# Altium PCB cs301_group7--4 holes.PcbDoc
Units mil, origin at the board's own origin, x right, y up, seen from the top; angles counter-clockwise.
Board outline 10825 x 6635 mil, 2 copper layers (Top Layer, Bottom Layer); 51 components, 21 nets, 162 pads, 0 vias.
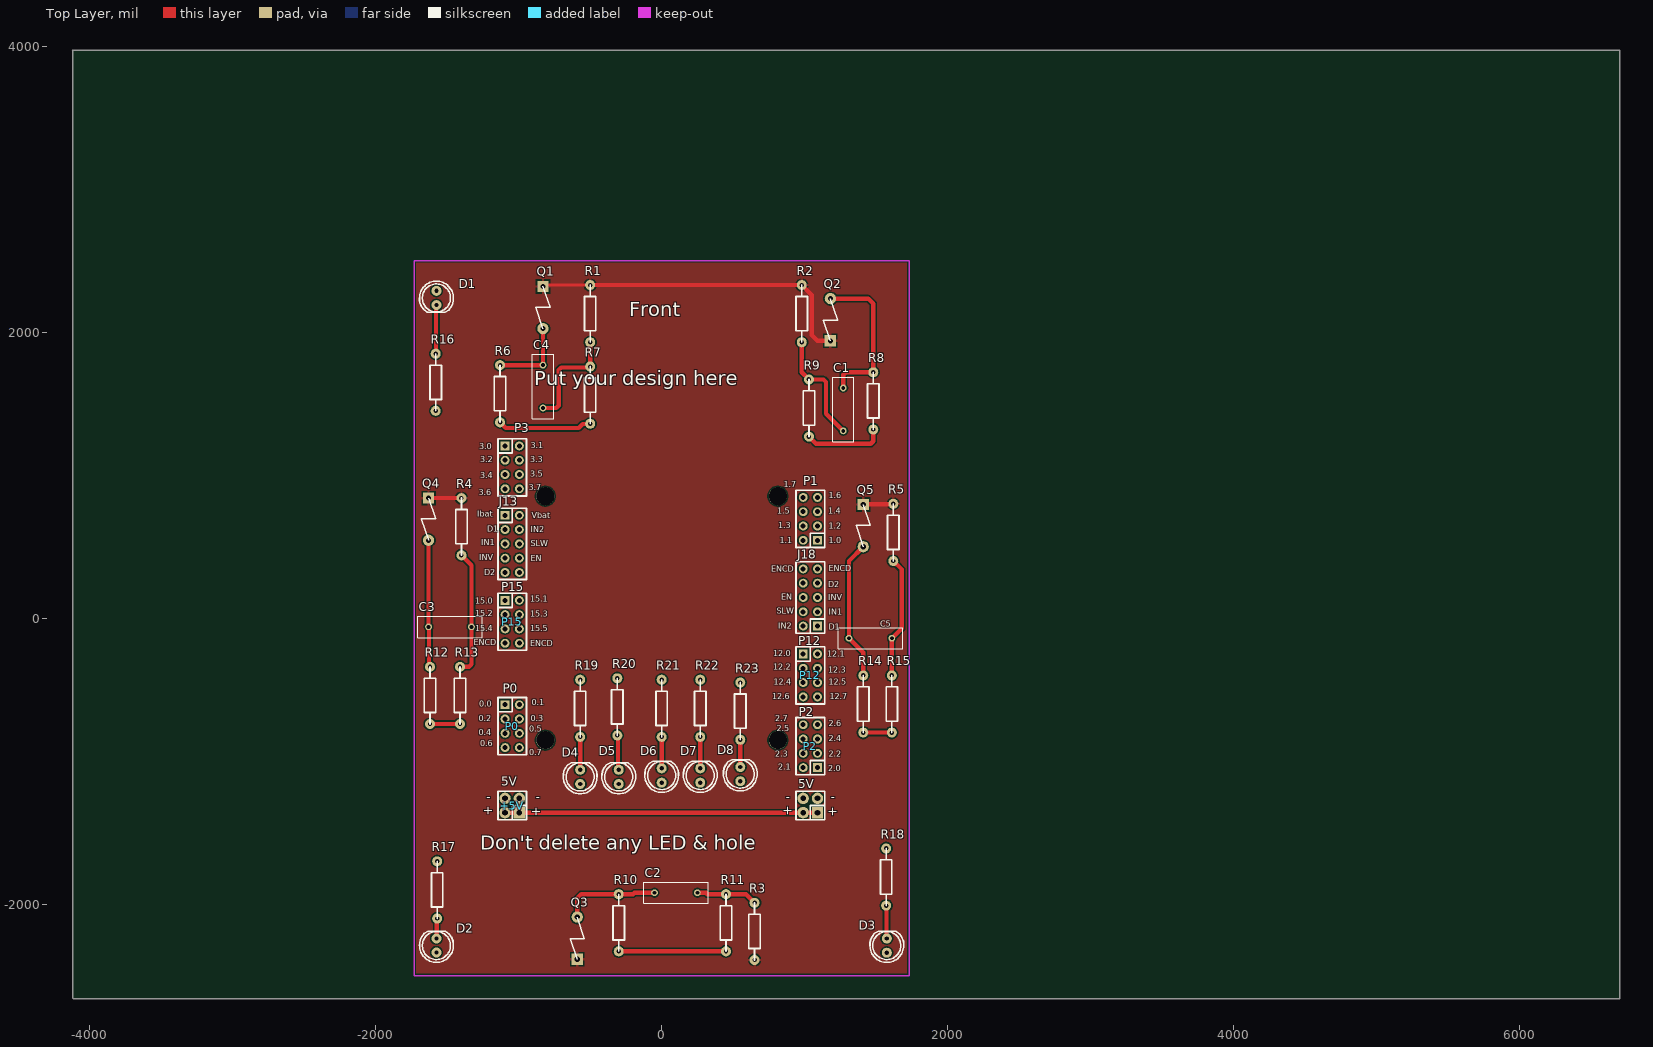
[diagram p0: Top Layer view]
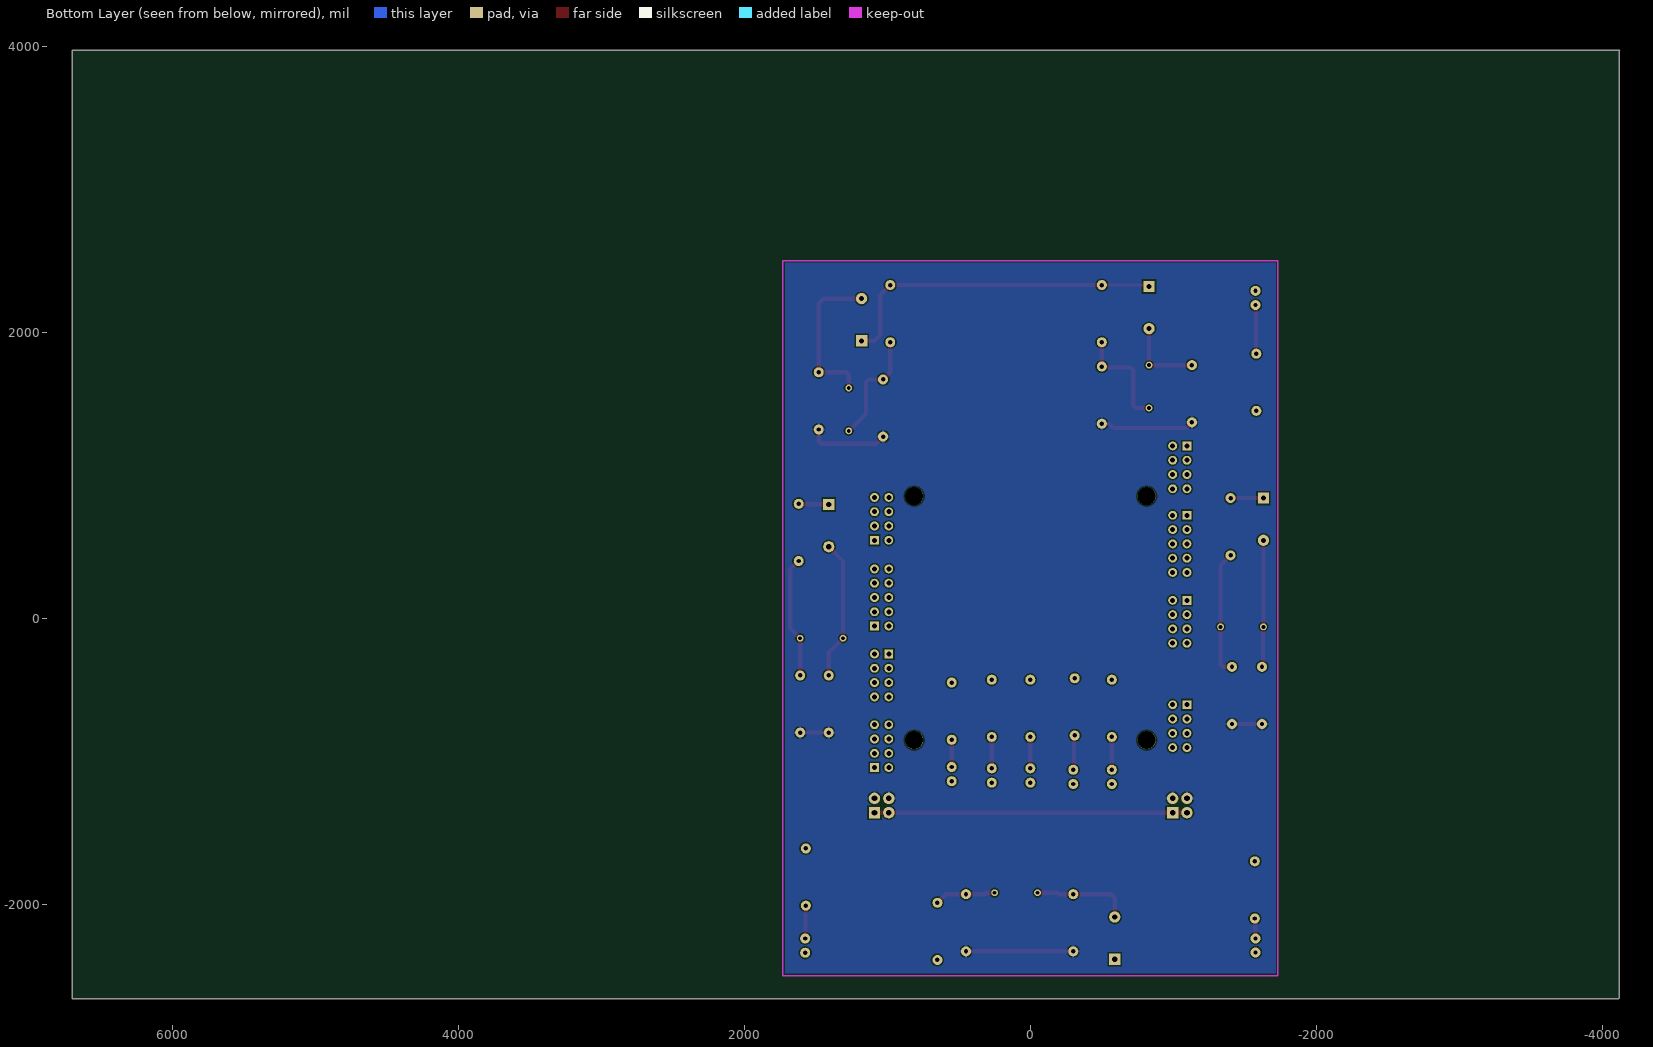
[diagram p1: Bottom Layer view, seen from below]

## Layer stack, top to bottom
Top Solder: solder mask 0.4, Solder Resist, Dk 3.5
Top Layer: signal copper 1.4
Dielectric1: dielectric 12.6, FR-4, Dk 4.8
Bottom Layer: signal copper 1.4
Bottom Solder: solder mask 0.4, Solder Resist, Dk 3.5

## Board outline
-4118.11,-2656.69 -4113.11,-2661.69 6701.89,-2661.69 6701.89,3973.31 -4123.11,3973.31 -4118.11,3968.31 -4118.11,-2656.69

## Design rules (kind name [scope] priority, off if disabled: settings)
Clearance [All] p1: gap=10 ignorepadtopadclearanceinfootprint=FALSE except(0: Arc-Hole Track-Hole SMDPad-Hole THPad-Hole Via-Hole Fill-Hole Poly-Hole Region-Hole Text-Hole)
PolygonConnect [All] p1: connectstyle=Relief reliefconductorwidth=20 reliefentries=4 polygonreliefangle="90 Angle" airgapwidth=10
RoomDefinition cs301_Group7 [InComponentClass('cs301_YourGroupNumber---------------')] p1: confinementstyle=ConfineOut formatcopy=TRUE lockcomponents=FALSE outline 6741.89,-2596.69 12371.89,-2596.69 12371.89,-1996.69 6741.89,-1996.69
RoutingVias [All] p1: holewidth=28 width=50 viastyle="Through Hole" minholewidth=28 minwidth=50 maxholewidth=28 maxwidth=50
SilkToSolderMaskClearance SilkscreenOverComponentPads [IsPad] p1: minsilkscreentomaskgap=10 clearancetoexposedcopper=TRUE
SolderMaskExpansion [All] p1: expansion=4 istentingtop=FALSE
Width [All] p1: maxlimit=30 minlimit=10 preferedwidth=10 minimp=50.000000 maximp=50.000000 favimp=50.000000
29 further rules are at their usual default settings.

## Components (designator, comment, footprint, x,y, rotation, side; value= is the part's Value field where it differs from the comment)
5V "5V" IDC4 1090,-1360 r90 top locked
+5V "5V" IDC4 -995,-1360 r90 top locked
C1 "Cap" RAD-0.3 1270,1460 r270 top value=56nF
C2 "Cap" RAD-0.3 100,-1920 r0 top value=56nF
C3 "Cap" RAD-0.3 -1480,-60 r0 top value=56nF
C4 "Cap" RAD-0.3 -830,1620 r270 top value=56nF
C5 "Cap" RAD-0.3 1460,-140 r0 top value=56nF
D1 "LED" LED0.1/5MM#1 -1574.8,2189.76 r180 top locked
D2 "LED" LED0.1/5MM#2 -1574.8,-2239.37 r0 top locked
D3 "LED" LED0.1/5MM#1 1574.8,-2239.37 r0 top locked
D4 "LED" LED0.1/5MM#1 -570,-1060 r0 top
D5 "LED" LED0.1/5MM#1 -300,-1060 r0 top
D6 "LED" LED0.1/5MM#1 0,-1050 r0 top
D7 "LED" LED0.1/5MM#1 270,-1050 r0 top
D8 "LED" LED0.1/5MM#1 550,-1040 r0 top
J13 "CON10" IDC10 -1095,720 r270 top locked
J18 "CON10" IDC10 1090,-55 r90 top locked
P0 "P0" idc8 -1095,-605 r270 top locked
P1 "P1" idc8 1090,545 r90 top locked
P2 "P2" idc8 1090,-1045 r90 top locked
P3 "P3" idc8 -1095,1205 r270 top locked
P12 "P12" idc8 990,-250 r270 top locked
P15 "P15" IDC8 -1095,125 r270 top locked
Q1 "VEMT3700" VEMT3700 -980,2420 r270 top
Q2 "VEMT3700" VEMT3700 1330,1840 r90 top
Q3 "VEMT3700" VEMT3700 -440,-2485 r90 top
Q4 "VEMT3700" VEMT3700 -1780,940 r270 top
Q5 "VEMT3700" VEMT3700 1260,895 r270 top
R1 "220k" AXIAL0.4 -500,1930 r90 top
R2 "220k" AXIAL0.4 980,1930 r90 top
R3 "220k" AXIAL0.4 650,-1990 r270 top
R4 "220k" AXIAL0.4 -1400,440 r90 top
R5 "220k" AXIAL0.4 1620,400 r90 top
R6 "47k" AXIAL0.4 -1130,1370 r90 top
R7 "68k" AXIAL0.4 -500,1360 r90 top
R8 "47k" AXIAL0.4 1480,1320 r90 top
R9 "68k" AXIAL0.4 1030,1270 r90 top
R10 "47k" AXIAL0.4 -300,-2330 r90 top
R11 "68k" AXIAL0.4 450,-2330 r90 top
R12 "47k" AXIAL0.4 -1620,-740 r90 top
R13 "68k" AXIAL0.4 -1410,-740 r90 top
R14 "47k" AXIAL0.4 1410,-800 r90 top
R15 "68k" AXIAL0.4 1610,-800 r90 top
R16 "RES2" AXIAL0.4 -1580,1850 r270 top
R17 "RES2" AXIAL0.4 -1570,-2100 r90 top
R18 "RES2" AXIAL0.4 1570,-1610 r270 top
R19 "68" AXIAL0.4 -570,-830 r90 top
R20 "68" AXIAL0.4 -310,-820 r90 top
R21 "68" AXIAL0.4 0,-830 r90 top
R22 "68" AXIAL0.4 270,-830 r90 top
R23 "68" AXIAL0.4 550,-850 r90 top

## Footprints (in the part's own frame and the unit in brackets; to place one, negate y for a bottom-side part, rotate by r counter-clockwise, add the part's x,y. Pads: shape width x height; smd on the part's side, far side on the other; paste and mask are expansions set on the pad)
AXIAL0.4 [mil]
  round 70 hole 31: 1(0,0) 2(400,0)
  silkscreen extent 0,-40 400,40
IDC4 [mil]
  rect 80x80 hole 40: 1(0,0)
  round 80 hole 40: 2(0,100) 3(100,0) 4(100,100)
  silkscreen extent -50,-50 150,150
idc8 [mil]
  rect 62x62 hole 35: 1(0,0)
  round 62 hole 35: 2(0,100) 3(100,0) 4(100,100) 5(200,0) 6(200,100) 7(300,0) 8(300,100)
  silkscreen extent -50,-50 350,150
IDC8 [mil]
  rect 62x62 hole 35: 1(0,0)
  round 62 hole 35: 2(0,100) 3(100,0) 4(100,100) 5(200,0) 6(200,100) 7(300,0) 8(300,100)
  silkscreen extent -50,-50 350,150
IDC10 [mil]
  rect 62x62 hole 35: 1(0,0)
  round 62 hole 35: 2(0,100) 3(100,0) 4(100,100) 5(200,0) 6(200,100) 7(300,0) 8(300,100) 9(400,0) 10(400,100)
  silkscreen extent -50,-50 450,150
LED0.1/5MM#1 [mil]
  round 70 hole 30: A(0,0) K(0,-100)
  silkscreen extent -118,-168 118,50
LED0.1/5MM#2 [mil]
  round 70 hole 30: A(0,0) K(0,-98.43)
  silkscreen extent -118,-168 118,50
RAD-0.3 [mm] "Radial Cap, Thru-Hole; 2 Leads; 0.3 in Pin Spacing"
  round 1.2 hole 0.7: 1(-3.81,0) 2(3.81,0)
  silkscreen extent -5.71,-1.91 5.71,1.91
VEMT3700 [mm]
  rect 2x2 hole 0.9: 1(2.54,3.81)
  round 2 hole 0.9: 2(10.033,3.81)
  silkscreen extent 2.54,2.54 10.03,5.08

## Part data
5V +5V: library part CON4, "Connector"
C1 C2 C3 C4 C5: "Capacitor", LatestRevisionDate=17-Jul-2002, LatestRevisionNote="Re-released for DXP Platform.", PackageDescription="Radial Cap, Thru-Hole; 2 Leads; 0.3 in Pin Spacing", PackageReference=RAD-0.3, Published=8-Jun-2000, Publisher="Altium Limited"
J13 J18: "Connector"
P0 P1 P2 P3: library part CON8, "Connector"
P12 P15: library part CON8_1, "Connector"
Q1 Q2 Q3 Q4 Q5: "Silicon NPN Phototransistor"
R1 R2 R3 R4 R5 R6 R7 R8 R9 R10 R11 R12 R13 R14 R15 R19 R20 R21 R22 R23: library part RES2

## Free pads (board coordinates)
  round 125.98 hole 125.98 unplated: 1(-813,-853) 1(-813,853) 1(813,-853) 1(813,853)

## Nets (pads, with @x,y where several pads share a name; then routed paths per layer and width w, separated by ;. In a path a pad name is that pad's centre, name@x,y a point inside that pad or via, vN(x,y) a via of type N, cw(c..) or ccw(c..) an arc to the next point about the centre after c; other vN are vias at no path point)
5V: Q1.1 Q2.1 Q3.1 Q4.1 Q5.1 R1.2 R2.2 R3.2 R4.2 R5.2 | length 2781.8
  Top Layer w20: Q1.1 -820,2330 R1.2
  Top Layer w30: Q4.1 R4.2 ; R1.2 R2.2 1050,2260 1050,1980 1090,1940 Q2.1 ; Q5.1 1412.5,797.5 1617.5,797.5 R5.2
+5V: 5V.1 5V.2 +5V.1 +5V.2 | length 2185
  Top Layer w30: +5V.2 +5V.1 5V.2 5V.1
GND: 5V.3 5V.4 +5V.3 +5V.4 R6.1 R7.1 R8.1 R9.1 R10.1 R11.1 R12.1 R13.1 R14.1 R15.1 | length 2379.4
  Top Layer w30: R12.1 R13.1 ; R6.1 -1090,1330 -580,1330 -551.57,1358.43 -501.57,1358.43 R7.1 ; R10.1 R11.1 ; R9.1 1080,1220 1462.43,1220 1480,1237.57 R8.1 ; R14.1 R15.1
NetC1_1: C1.1 Q2.2 R8.2 | length 1104.2
  Top Layer w30: Q2.2 1445,2235 1480,2200 R8.2 1287.57,1720 1270,1702.43 C1.1
NetC1_2: C1.2 R2.1 R9.2 | length 800.1
  Top Layer w30: R2.1 980,1720 R9.2 1132.43,1670 1150,1652.43 1150,1430 C1.2
NetC2_1: C2.1 Q3.2 R10.2 | length 688
  Top Layer w30: Q3.2 -590,-1957.57 -562.43,-1930 R10.2 -200,-1930 -190,-1920 C2.1
NetC2_2: C2.2 R3.1 R11.2 | length 429
  Top Layer w30: C2.2 310,-1920 320,-1930 R11.2 590,-1930 R3.1
NetC3_1: C3.1 Q4.2 R12.2 | length 889.1
  Top Layer w30: Q4.2 C3.1 -1626.7,-63.3 -1626.7,-333.3 R12.2
NetC3_2: C3.2 R4.1 R13.2 | length 878.7
  Top Layer w30: R13.2 -1347.57,-340 -1330,-322.43 C3.2 -1330,370 R4.1
NetC4_1: C4.1 Q1.2 R6.2 | length 555
  Top Layer w30: R6.2 C4.1 Q1.2
NetC4_2: C4.2 R1.1 R7.2 | length 765.6
  Top Layer w30: C4.2 -737.57,1470 -720,1487.57 -720,1735.86 -702.43,1753.43 -506.57,1753.43 R7.2 R1.1
NetC5_1: C5.1 Q5.2 R14.2 | length 982.8
  Top Layer w30: R14.2 1410,-240 C5.1 1310,400 Q5.2
NetC5_2: C5.2 R5.1 R15.2 | length 853.8
  Top Layer w30: R15.2 C5.2 1680,-70 1680,340 R5.1
NetD1_A: D1.A R16.1 | length 341.9
  Top Layer w30: R16.1 -1577.4,1852.6 -1577.4,2187.17 D1.A
NetD2_A: D2.A R17.1 | length 141.4
  Top Layer w30: D2.A -1572.4,-2236.97 -1572.4,-2102.4 R17.1
NetD3_A: D3.A R18.2 | length 231.4
  Top Layer w30: R18.2 1572.4,-2012.4 1572.4,-2236.97 D3.A
NetD4_A: D4.A R19.1 | length 230
  Top Layer w30: D4.A R19.1
NetD5_A: D5.A R20.1 | length 244.1
  Top Layer w30: R20.1 -305,-825 -305,-1055 D5.A
NetD6_A: D6.A R21.1 | length 220
  Top Layer w30: D6.A R21.1
NetD7_A: D7.A R22.1 | length 220
  Top Layer w30: D7.A R22.1
NetD8_A: D8.A R23.1 | length 190
  Top Layer w30: D8.A R23.1
pads on no net: D1.K D2.K D3.K D4.K D5.K D6.K D7.K D8.K J13.1 J13.2 J13.3 J13.4 J13.5 J13.6 J13.7 J13.8 J13.9 J13.10 J18.1 J18.2 J18.3 J18.4 J18.5 J18.6 J18.7 J18.8 J18.9 J18.10 P0.1 P0.2 P0.3 P0.4 P0.5 P0.6 P0.7 P0.8 P1.1 P1.2 P1.3 P1.4 P1.5 P1.6 P1.7 P1.8 P2.1 P2.2 P2.3 P2.4 P2.5 P2.6 P2.7 P2.8 P3.1 P3.2 P3.3 P3.4 P3.5 P3.6 P3.7 P3.8 P12.1 P12.2 P12.3 P12.4 P12.5 P12.6 P12.7 P12.8 P15.1 P15.2 P15.3 P15.4 P15.5 P15.6 P15.7 P15.8 R16.2 R17.2 R18.1 R19.2 R20.2 R21.2 R22.2 R23.2

## Polygon pours and split planes (outlines as drawn)
5V on Top Layer "5V_L01_P000" (solid, pour order 0): 1725,-2490 -1720,-2490 -1720,2490 1725,2490
GND on Bottom Layer "GND_L02_P001" (solid, pour order 1): 1725,-2490 -1720,-2490 -1720,2500 1725,2500 1720,2490

## Keep-outs
Keep-Out Layer:
  lines w10: -1730,-2500 -1730,2500 1730,2500 1730,-2500 -1730,-2500

## Silkscreen, mask and mechanical layers (free items; w line width, h text height)
Top Overlay:
  text "Front" at -228.11,2113.31 h100
  text "Put your design here" at -890,1630 h100
  text "3.1" at -915,1190 h40
  text "3.0" at -1275,1180 h40
  text "3.2" at -1270,1090 h40
  text "3.3" at -920,1090 h40
  text "3.5" at -920,990 h40
  text "3.4" at -1270,980 h40
  text "1.7" at 855,915 h40
  text "3.7" at -930,895 h40
  text "3.6" at -1280,860 h40
  text "1.6" at 1170,840 h40
  text "1.5" at 810,730 h40
  text "1.4" at 1165,730 h40
  text "Ibat" at -1290,710 h40
  text "Vbat" at -910,700 h40
  text "1.3" at 815,630 h40
  text "1.2" at 1170,625 h40
  text "D1" at -1220,605 h40
  text "IN2" at -915,600 h40
  text "1.1" at 825,525 h40
  text "1.0" at 1170,525 h40
  text "IN1" at -1260,510 h40
  text "SLW" at -915,505 h40
  text "INV" at -1275,405 h40
  text "EN" at -915,400 h40
  text "ENCD" at 1170,330 h40
  text "ENCD" at 765,325 h40
  text "D2" at -1240,300 h40
  text "D2" at 1165,215 h40
  text "EN" at 835,130 h40
  text "INV" at 1165,125 h40
  text "15.1" at -920,115 h40
  text "15.0" at -1305,100 h40
  text "SLW" at 805,30 h40
  text "IN1" at 1170,25 h40
  text "15.2" at -1305,15 h40
  text "15.3" at -920,10 h40
  text "IN2" at 815,-75 h40
  text "D1" at 1170,-80 h40
  text "15.4" at -1305,-90 h40
  text "15.5" at -920,-90 h40
  text "ENCD" at -1315,-190 h40
  text "ENCD" at -920,-195 h40
  text "12.0" at 780,-265 h40
  text "12.1" at 1160,-270 h40
  text "12.2" at 780,-360 h40
  text "12.3" at 1165,-380 h40
  text "12.4" at 785,-465 h40
  text "12.5" at 1170,-465 h40
  text "12.6" at 775,-565 h40
  text "12.7" at 1175,-565 h40
  text "0.1" at -910,-610 h40
  text "0.0" at -1275,-620 h40
  text "0.2" at -1280,-720 h40
  text "0.3" at -915,-720 h40
  text "2.7" at 795,-720 h40
  text "2.6" at 1170,-755 h40
  text "2.5" at 805,-790 h40
  text "0.5" at -925,-795 h40
  text "0.4" at -1280,-820 h40
  text "2.4" at 1170,-860 h40
  text "0.6" at -1270,-895 h40
  text "0.7" at -925,-960 h40
  text "2.3" at 795,-970 h40
  text "2.2" at 1170,-970 h40
  text "2.1" at 815,-1060 h40
  text "2.0" at 1165,-1070 h40
  text "-" at -1195,-1230 h60 r180
  text "-" at -850,-1230 h60 r180
  text "-" at 900,-1230 h60 r180
  text "-" at 1215,-1230 h60 r180
  text "+" at -1185,-1380 h60 r90
  text "+" at 910,-1380 h60 r90
  text "+" at -850,-1390 h60 r90
  text "+" at 1225,-1390 h60 r90
  text "Don't delete any LED & hole" at -1270,-1620 h100